# Altium PCB PCB_Switc.PcbDoc
Units mm, origin at the board's own origin, x right, y up, seen from the top; angles counter-clockwise.
Board outline 55.37 x 24.51 mm, 2 copper layers (Top Layer, Bottom Layer); 8 components, 9 nets, 25 pads, 0 vias.
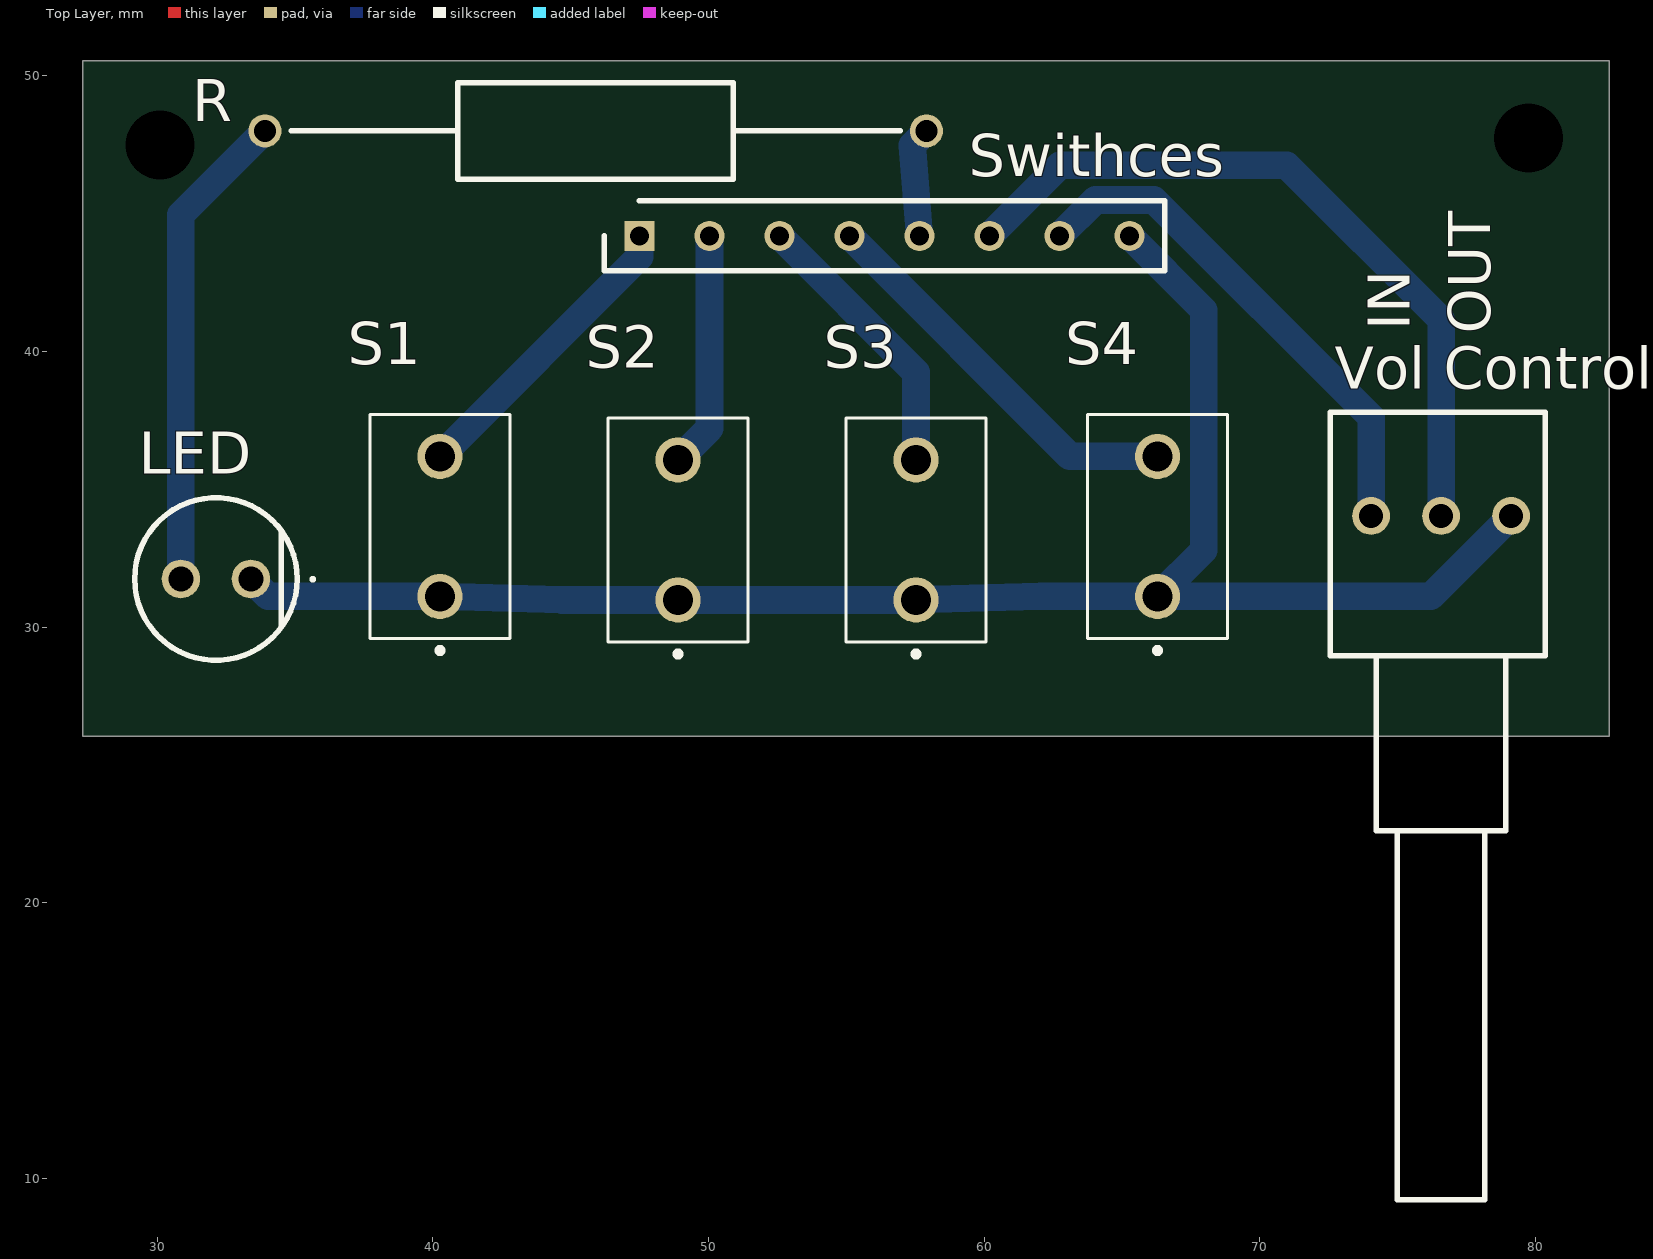
[diagram p0: Top Layer view]
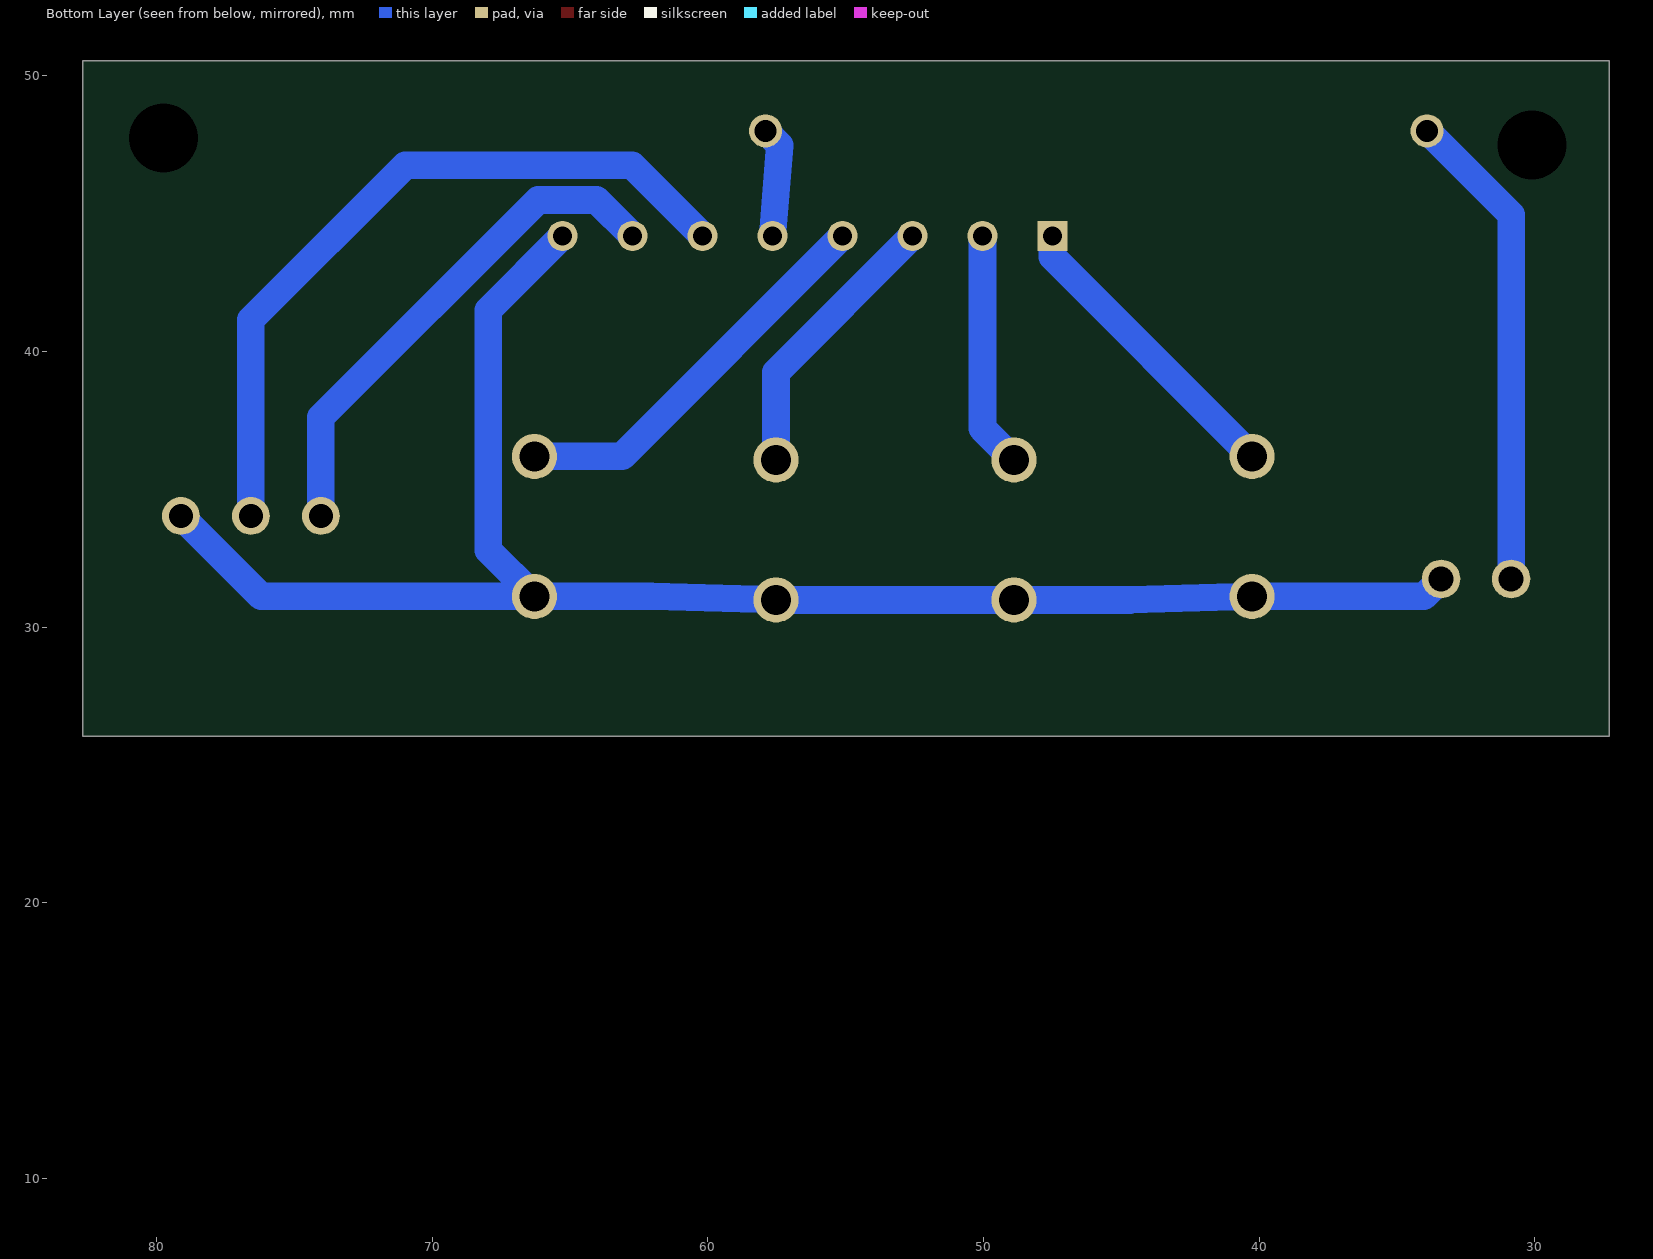
[diagram p1: Bottom Layer view, seen from below]
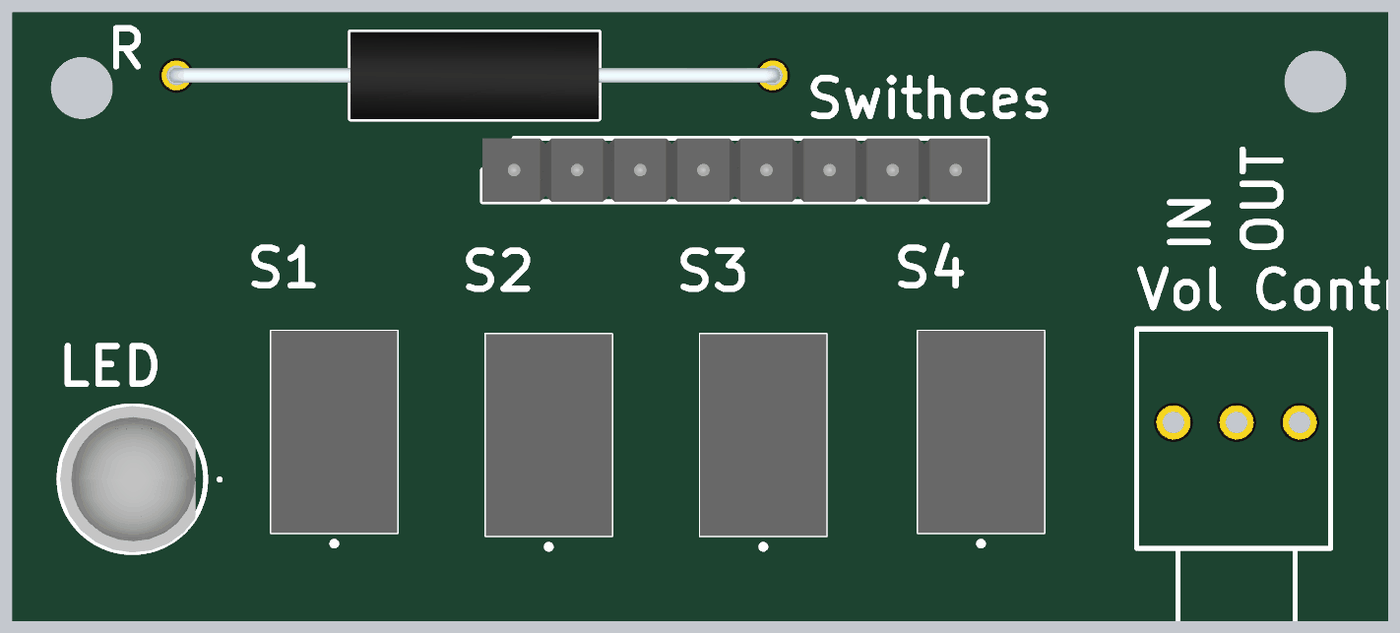
[diagram p2: 3D render of the assembled board from above, using the file's embedded part models]

## Layer stack, top to bottom
Top Solder: solder mask 0.0102, Solder Resist, Dk 3.5
Top Layer: signal copper 0.0356
Dielectric 1: dielectric 0.32, FR-4, Dk 4.8
Bottom Layer: signal copper 0.0356
Bottom Solder: solder mask 0.0102, Solder Resist, Dk 3.5

## Board outline
27.305,26.035 82.677,26.035 82.677,50.546 27.305,50.546

## Design rules (kind name [scope] priority, off if disabled: settings)
Clearance [All] p1: gap=0.254 ignorepadtopadclearanceinfootprint=FALSE except(0: Arc-Hole Track-Hole SMDPad-Hole THPad-Hole Via-Hole Fill-Hole Poly-Hole Region-Hole Text-Hole)
PolygonConnect [All] p1: connectstyle=Relief reliefconductorwidth=0.254 reliefentries=4 polygonreliefangle="90 Angle" airgapwidth=0.254
RoutingVias [All] p1: holewidth=0.711 width=1.27 viastyle="Through Hole" minholewidth=0.711 minwidth=1.27 maxholewidth=0.711 maxwidth=1.27
SolderMaskExpansion [All] p1: expansion=0.102 istentingtop=FALSE
Width [All] p1: maxlimit=2 minlimit=1 preferedwidth=1
30 further rules are at their usual default settings.

## Components (designator, comment, footprint, x,y, rotation, side; value= is the part's Value field where it differs from the comment)
LED "SSL-LX5093TC" SSL-LX5093SGC/B 32.131,31.75 r0 top
R "220" RESAD2400W59L1000D350 33.909,48.006 r0 top
S1 "EP11SD1CBE" EP11SD1CBE 40.259,33.655 r0 top
S2 "EP11SD1CBE" EP11SD1CBE 48.895,33.528 r0 top
S3 "EP11SD1CBE" EP11SD1CBE 57.531,33.528 r0 top
S4 "EP11SD1CBE" EP11SD1CBE 66.294,33.655 r0 top
Swithces "08-0625-70" HDRV8W51P0X254_1X8_2032X254X816P 47.498,44.196 r0 top
"Vol Controller" "14910A0BHSX10502KA" 14910F0GJSX10103KA 76.581,22.616 r270 top

## Footprints (in the part's own frame and the unit in brackets; to place one, negate y for a bottom-side part, rotate by r counter-clockwise, add the part's x,y. Pads: shape width x height; smd on the part's side, far side on the other; paste and mask are expansions set on the pad)
14910F0GJSX10103KA [mm]
  round 1.37 hole 0.87: 1(-11.42,-2.54) 2(-11.42,0) 3(-11.42,2.54)
  silkscreen extent -15.18,-4.02 13.39,3.79
EP11SD1CBE [mm]
  round 1.635 hole 1.09: 1(0,-2.54) 3(0,2.54)
  silkscreen extent -2.54,-4.6 2.54,4.07, body extent -2.54,-4.07 2.54,4.07, height 18.1
HDRV8W51P0X254_1X8_2032X254X816P [mm]
  rect 1.1x1.1 hole 0.7: 1(0,0)
  round 1.1 hole 0.7: 2(2.54,0) 3(5.08,0) 4(7.62,0) 5(10.16,0) 6(12.7,0) 7(15.24,0) 8(17.78,0)
  silkscreen extent -1.27,-1.27 19.05,1.27, body extent -1.27,-1.27 19.05,1.27, height 8.16
RESAD2400W59L1000D350 [mm]
  round 1.2 hole 0.8: 1(0,0) 2(24,0)
  silkscreen extent 0.95,-1.75 23.05,1.75, body extent -0.29,-1.75 24.3,1.75, height 3.5
SSL-LX5093SGC/B [mm]
  round 1.4 hole 0.91: 1(1.27,0) 2(-1.27,0)
  silkscreen extent -2.95,-2.95 3.54,2.95, body extent -2.91,-2.95 2.54,2.95, height 9.57

## Part data
LED: "LED", Manufacturer_Name=Lumex, Mouser Part Number=696-SSL-LX5093TC, Arrow Part Number=SSL-LX5093TC, Arrow Price/Stock=https://www.arrow.com/en/products/ssl-lx5093tc/lumex?region=nac, Datasheet Link=http://www.lumex.com.tw/spec/SSL-LX5093TC.pdf, Manufacturer_Part_Number=SSL-LX5093TC, Mouser Price/Stock=https://www.mouser.co.uk/ProductDetail/Lumex/SSL-LX5093TC?qs=94qWIstW55WGdi06hcoEWQ%3D%3D
R: library part 293-220-RC, "Resistor", Manufacturer_Name="KOA Speer", Arrow Part Number=293-220-RC, Arrow Price/Stock=https://www.arrow.com/en/products/293-220-rc/koa-speer-electronics, Datasheet Link=https://www.mouser.co.uk/datasheet/2/351/xicon_10042017_XC-600035-1-1201685.pdf, Manufacturer_Part_Number=293-220-RC
S1 S2 S3 S4: "Switch (2-Pin Push)", Manufacturer_Name="C & K COMPONENTS", Mouser Part Number=611-EP11-003, Arrow Part Number=EP11SD1CBE, Arrow Price/Stock=https://www.arrow.com/en/products/ep11sd1cbe/ck?region=nac, Datasheet Link=https://www.ckswitches.com/media/1408/ep.pdf, Height=18mm, Manufacturer_Part_Number=EP11SD1CBE, Mouser Price/Stock=https://www.mouser.co.uk/ProductDetail/CK/EP11SD1CBE/?qs=iGs0Ib%2FftARmZmOE2VC3xw%3D%3D
Swithces: "Connector", Manufacturer_Name=ARIES, Mouser Part Number=535-08-0625-70, Datasheet Link=https://www.mouser.in/datasheet/2/35/12036-pin-line-header-1224908.pdf, Height=8.16mm, Manufacturer_Part_Number=08-0625-70, Mouser Price/Stock=https://www.mouser.co.uk/ProductDetail/Aries-Electronics/08-0625-70?qs=BpaRKvA4VqGb7C%252By2JfgtQ%3D%3D
"Vol Controller": "Variable Resistor", Manufacturer_Name=Vishay, Mouser Part Number=594-14910A0BHSP502KA, Datasheet Link=https://www.mouser.com/datasheet/2/427/148149-239924.pdf, Manufacturer_Part_Number=14910A0BHSX10502KA, Mouser Price/Stock=https://www.mouser.co.uk/ProductDetail/Vishay-Spectrol/14910A0BHSX10502KA/?qs=sKxHajcpPaBuEjDBnLxOZg%3D%3D

## Free pads (board coordinates)
  oval 1.6x0.55 hole 2.5 unplated mask+0.1: 48(30.099,47.498) 49(79.756,47.752)

## Nets (pads, with @x,y where several pads share a name; then routed paths per layer and width w, separated by ;. In a path a pad name is that pad's centre, name@x,y a point inside that pad or via, vN(x,y) a via of type N, cw(c..) or ccw(c..) an arc to the next point about the centre after c; other vN are vias at no path point)
GND: "Vol Controller.3" LED.1 S1.1 S2.1 S3.1 S4.1 Swithces.8 | length 62.1
  Bottom Layer w1: LED.1 34.036,31.115 S1.1 44.704,30.988 S2.1 S3.1 62.052,31.115 S4.1 ; Swithces.8 67.97,41.504 67.97,32.791 S4.1 ; 79.121,34.036 76.2,31.115 S4.1
NetLED_2: LED.2 R.1 | length 17.5
  Bottom Layer w1: LED.2 30.861,44.958 R.1
NetR_2: R.2 Swithces.5 | length 4
  Bottom Layer w1: Swithces.5 57.391,47.488 R.2
NetS1_3: S1.3 Swithces.1 | length 11
  Bottom Layer w1: S1.3 47.498,43.434 Swithces.1
NetS2_3: S2.3 Swithces.2 | length 8.6
  Bottom Layer w1: S2.3 50.038,37.211 Swithces.2
NetS3_3: S3.3 Swithces.3 | length 10.2
  Bottom Layer w1: Swithces.3 57.531,39.243 S3.3
NetS4_3: S4.3 Swithces.4 | length 14.5
  Bottom Layer w1: Swithces.4 63.119,36.195 S4.3
NetSwithces_6: "Vol Controller.2" Swithces.6 | length 26.9
  Bottom Layer w1: Swithces.6 62.756,46.754 70.975,46.754 76.581,41.148 76.581,34.036
NetSwithces_7: "Vol Controller.1" Swithces.7 | length 18.7
  Bottom Layer w1: Swithces.7 64.042,45.5 66.158,45.5 74.041,37.617 74.041,34.036

## Silkscreen, mask and mechanical layers (free items; w line width, h text height)
Top Overlay:
  text "IN" at 75.438,40.767 h1.52 r90
  text "OUT" at 78.359,40.64 h1.52 r90